# EAGLE board PowerBoard (EAGLE 7.4.0)
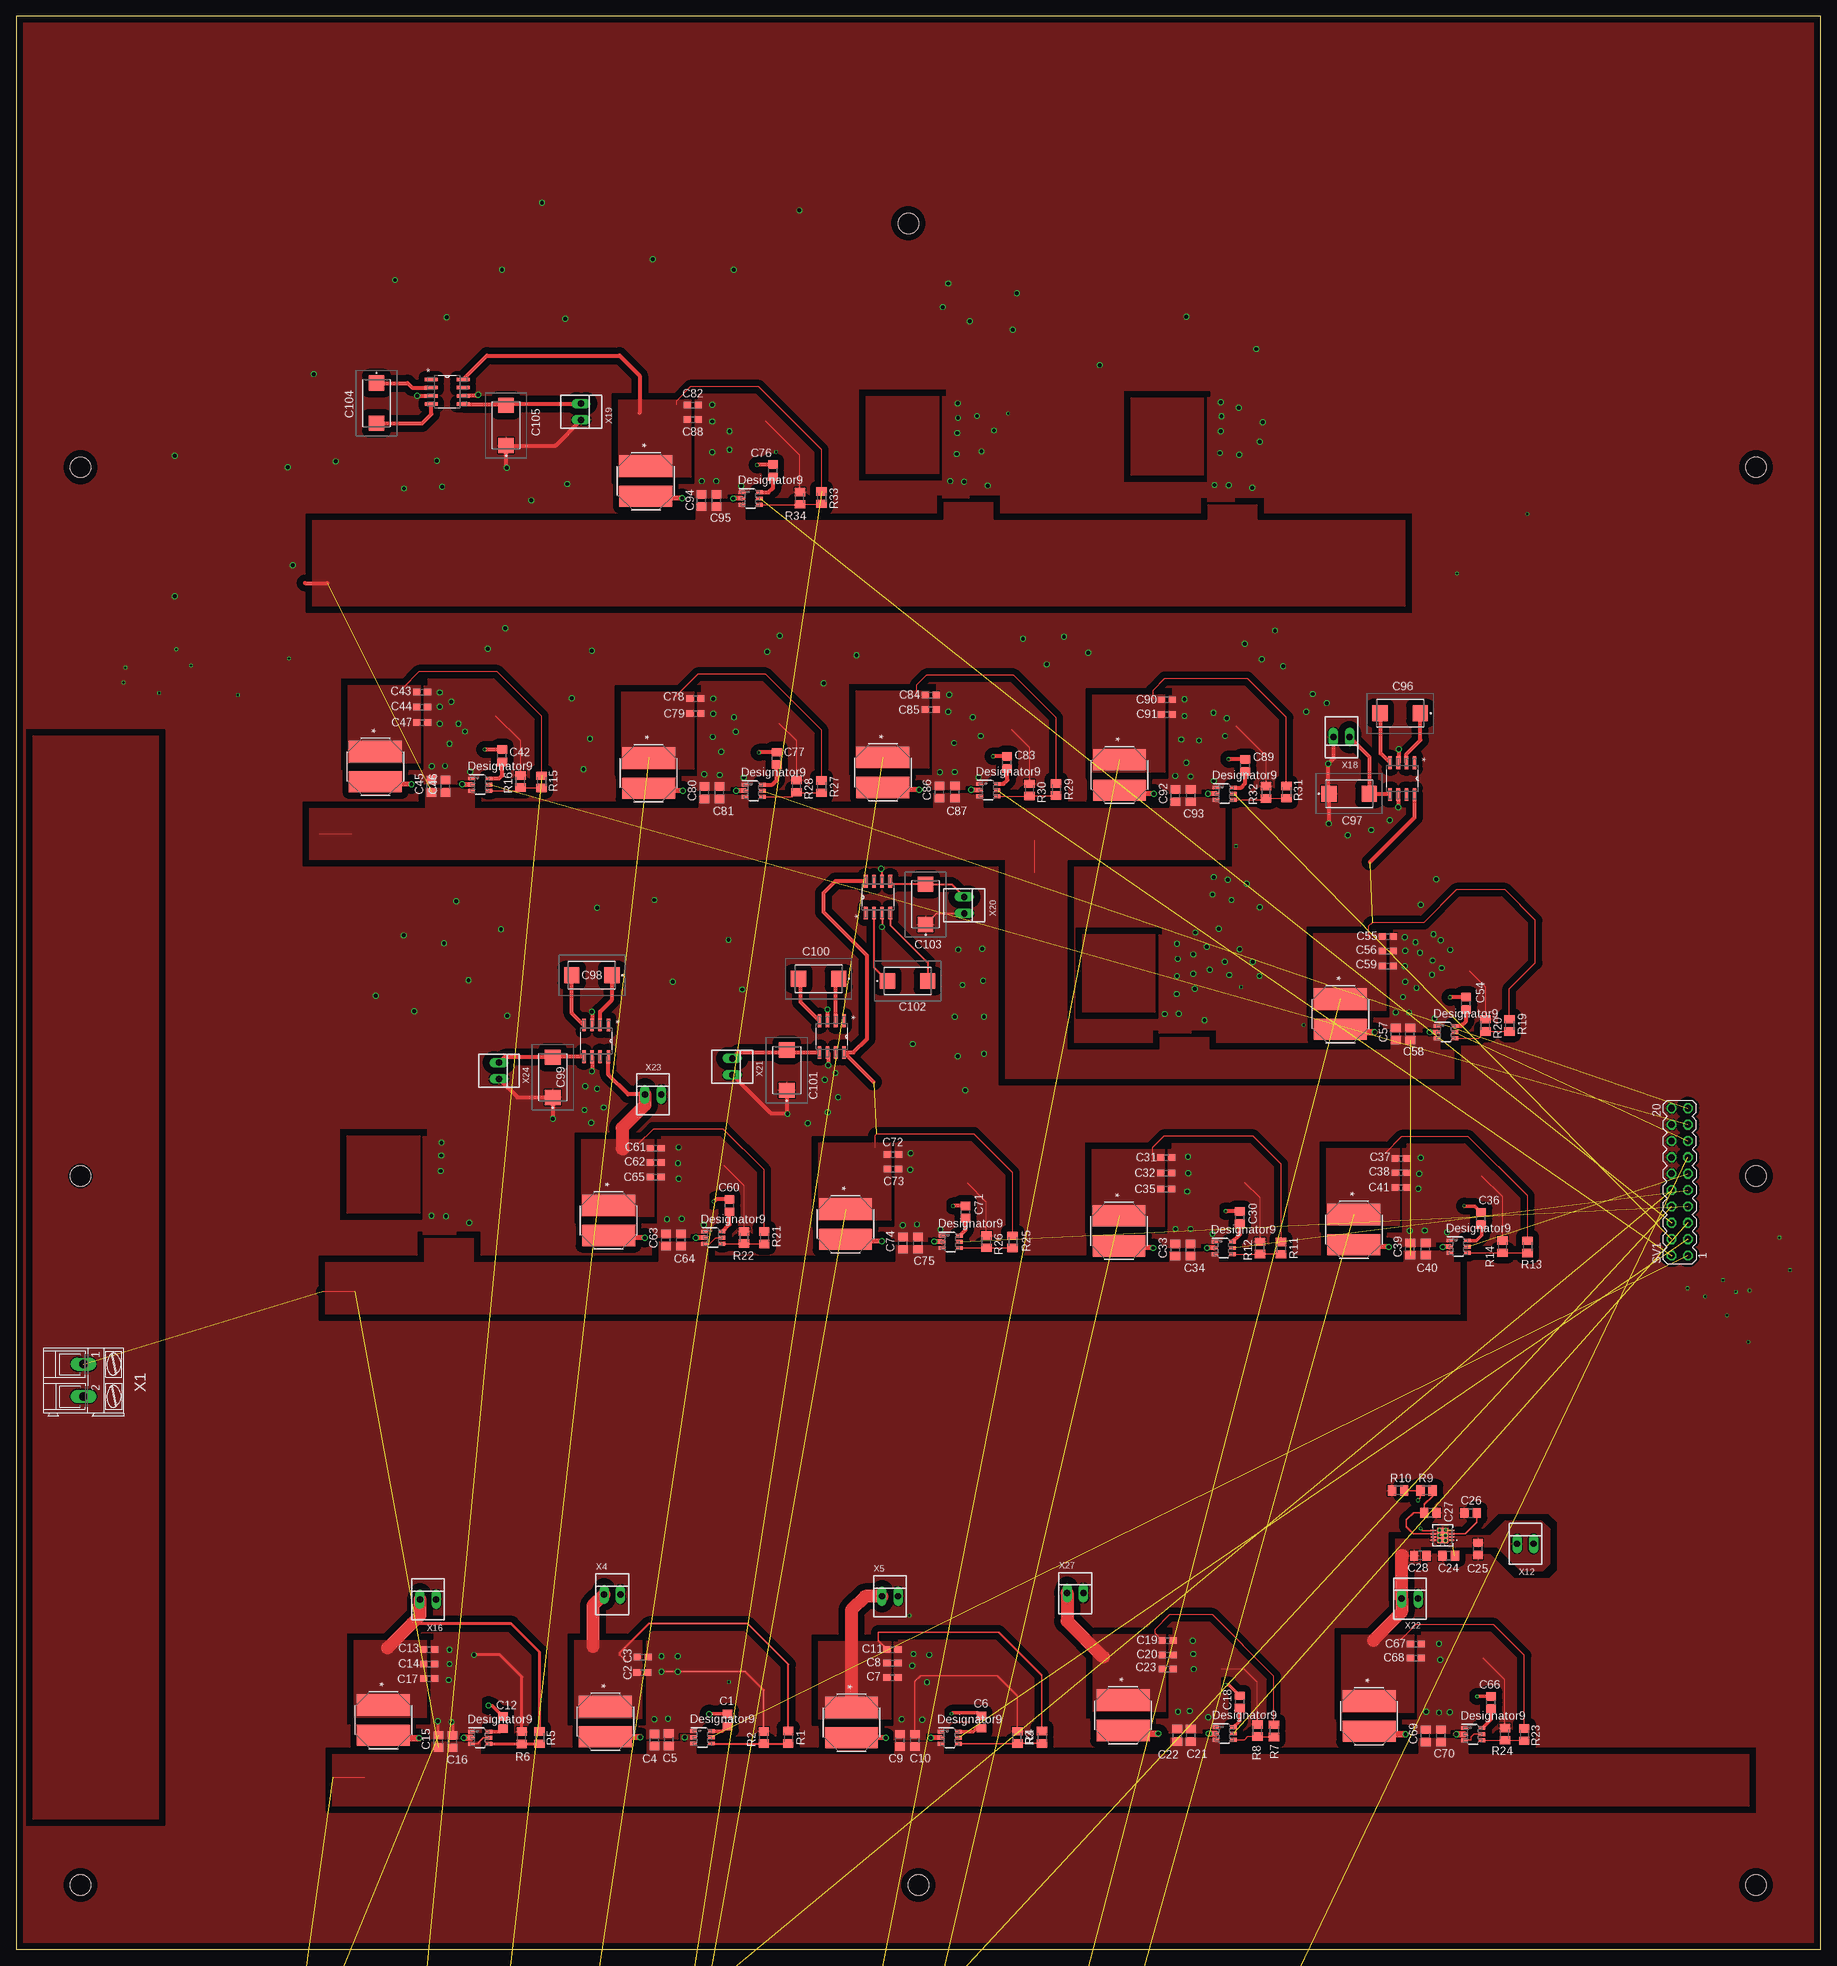
[diagram p0: board, top side]
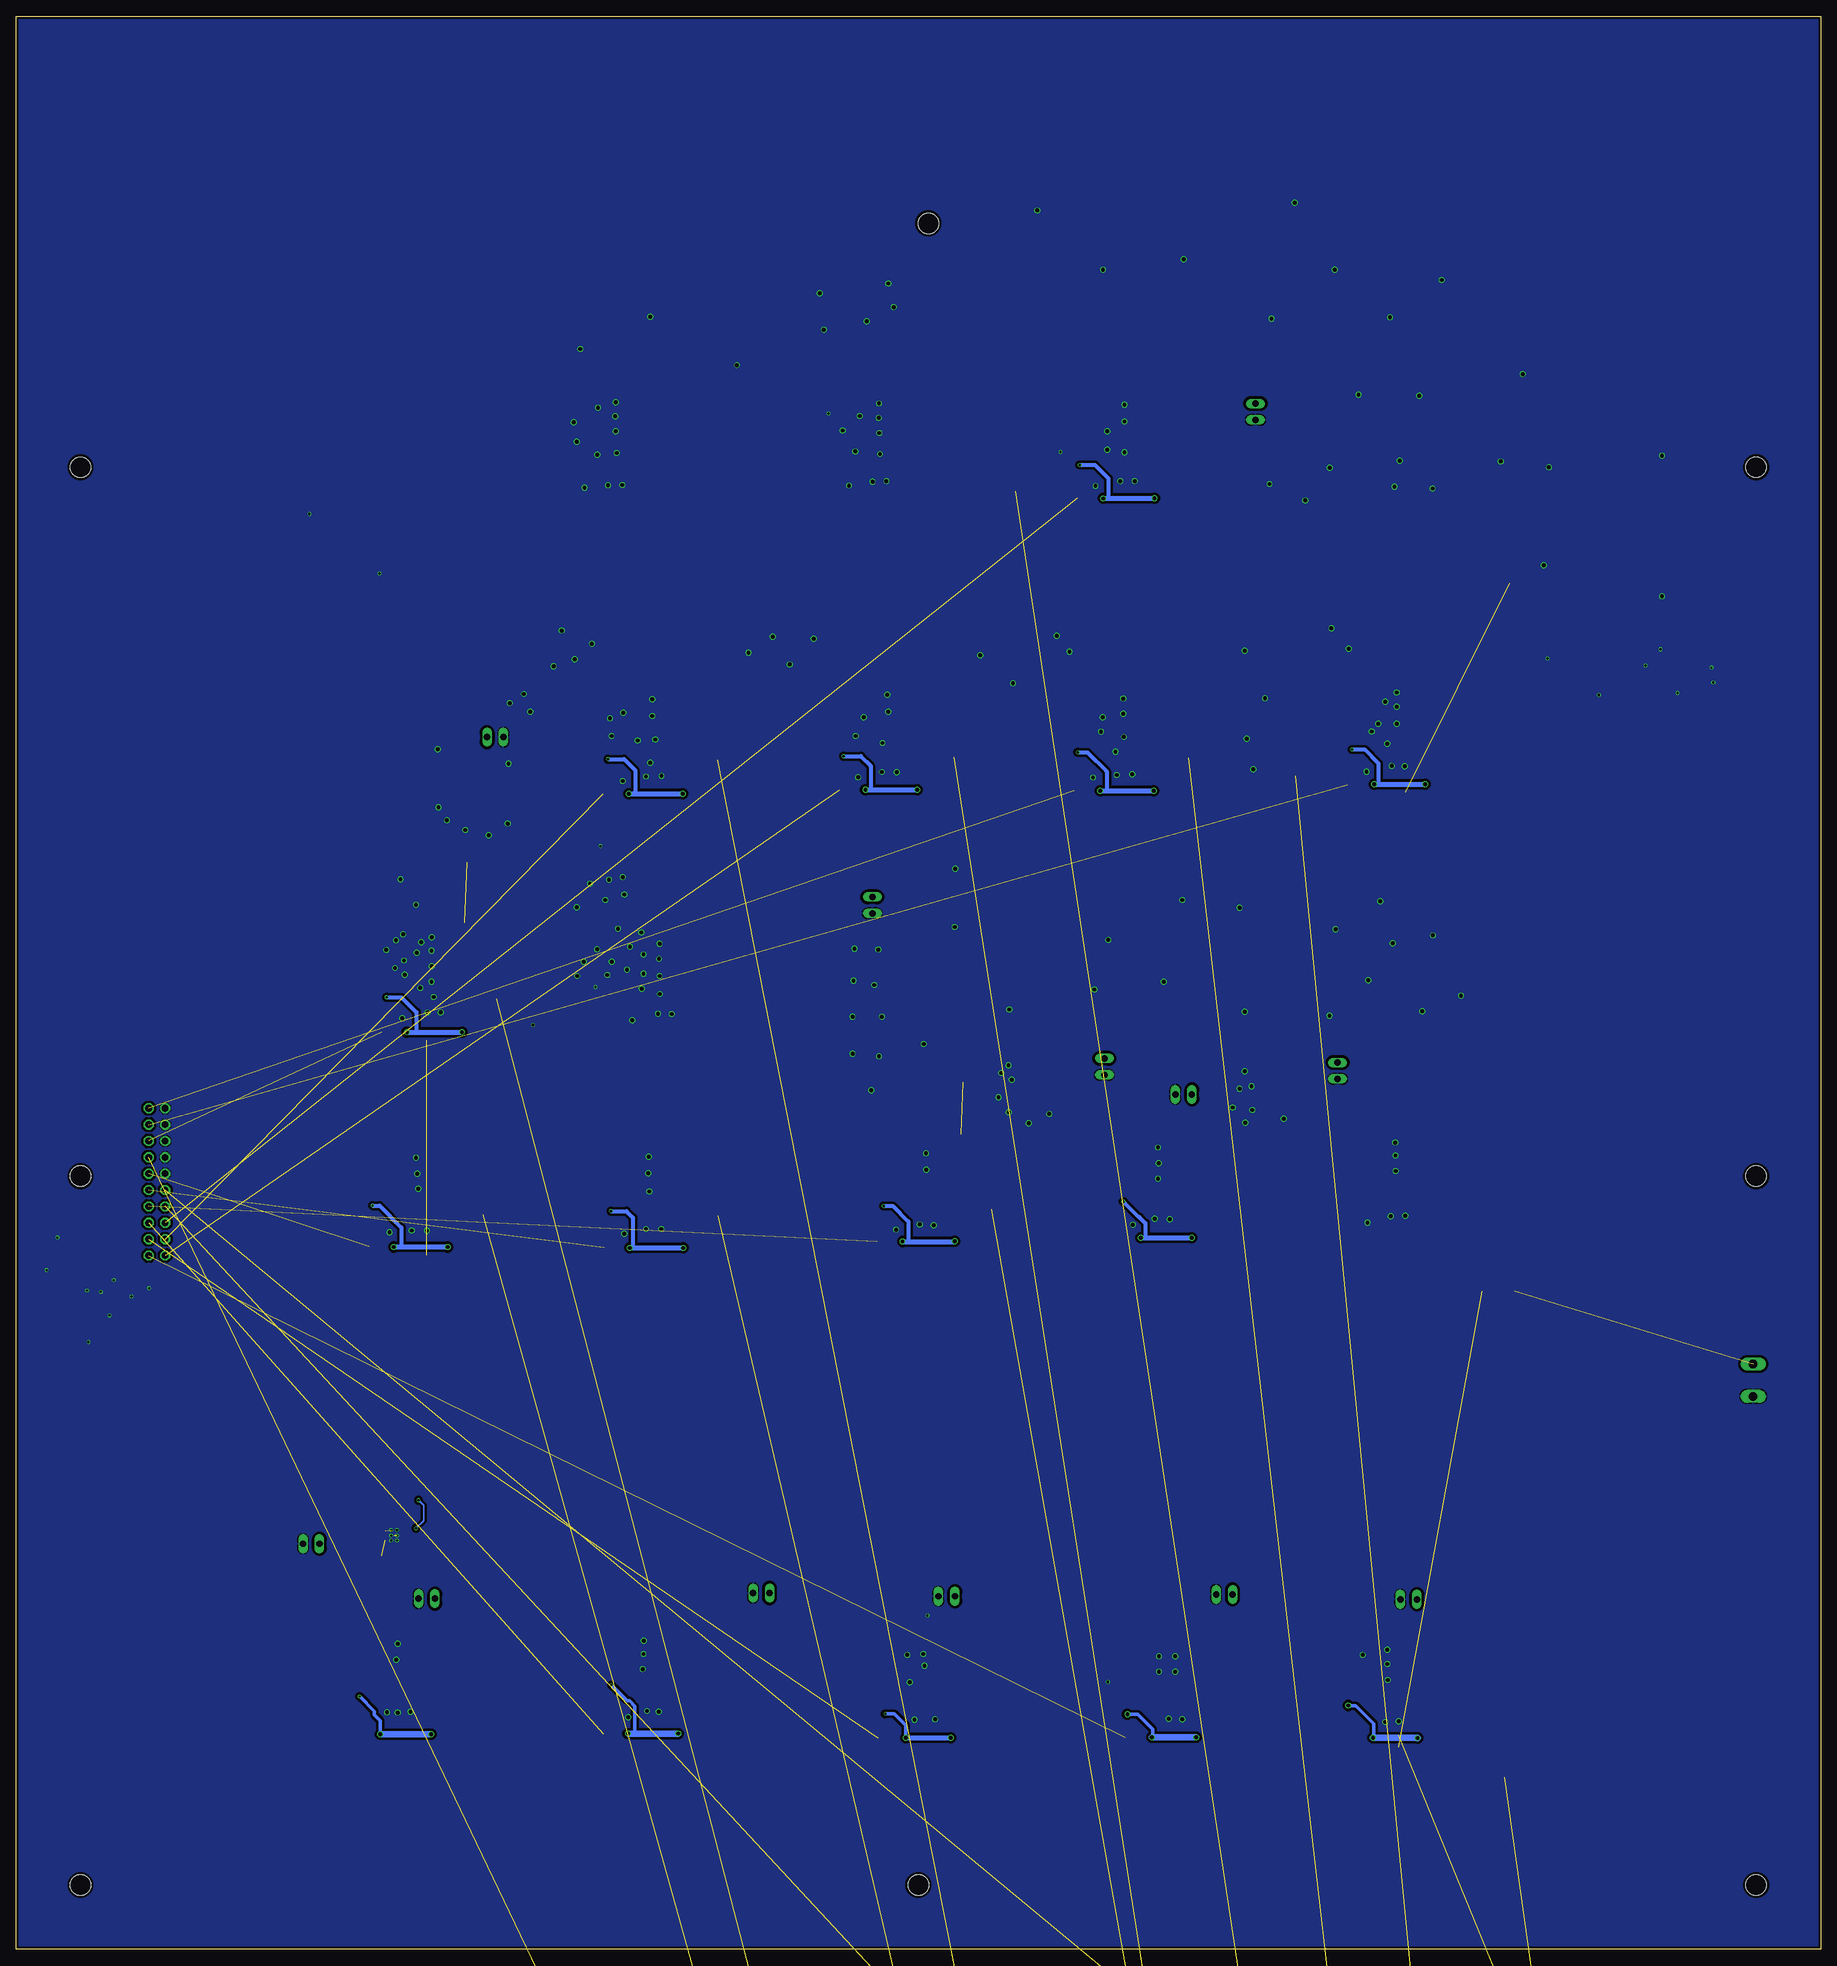
[diagram p1: board, bottom side, seen from below]

Size 280 x 300 mm. Coordinates in mm from the lower left corner, seen from the top.
Outline: 0,0 280,0 280,300 0,300 0,0
Copper layers (1*16): Top 0.035mm / dielectric 1.5mm / Bottom 0.035mm
Design rules "PCBWay_2L_100um-Track *": minimum track width 0.1mm, minimum drill 0.3mm, track to track 0.2mm, track to pad 0.1mm, pad to pad 0.1mm, via to via 0.1mm, smd to smd 0mil, copper to edge 0.3mm, drill to drill 10mil, minimum pad ring 6mil, minimum via ring 0.1mm, stop-mask expansion 2mil, vias tented up to drill 0.45mm, thermal gap 0.2mm
Holes 3.2 mm at 10,10 270,10 270,230 10,230 138.45,267.85 140,10 270,120 10,120

## Footprints (pad centres in the part's own frame; a part is rotated, then mirrored left to right if it is on the bottom)
C0805 = smd 1.3 x 1.5: 1 -0.95,0; 2 0.95,0
C0603 = smd 1.1 x 1: 1 -0.85,0; 2 0.85,0
T521W = smd 2.37 x 2.43: 1 -3.12,0; 2 3.12,0
M0805 = smd 1.3 x 1.6: 1 -0.95,0; 2 0.95,0
MA10-2 = drill 1.016 octagon: 1 -11.43,-1.27; 2 -11.43,1.27; 3 -8.89,-1.27; 4 -8.89,1.27; 5 -6.35,-1.27; 6 -6.35,1.27; 7 -3.81,-1.27; 8 -3.81,1.27; 9 -1.27,-1.27; 10 -1.27,1.27; 11 1.27,-1.27; 12 1.27,1.27; 13 3.81,-1.27; 14 3.81,1.27; 15 6.35,-1.27; 16 6.35,1.27; 17 8.89,-1.27; 18 8.89,1.27; 19 11.43,-1.27; 20 11.43,1.27
DDC0006A_N = smd 1 x 0.6: 1 -1.375,0.95; 2 -1.375,0; 3 -1.375,-0.95; 4 1.375,-0.95; 5 1.375,0; 6 1.375,0.95
CP_8_11_ADI = smd 0.805 x 0.249: 1 -1.402,0.75; 2 -1.402,0.25; 3 -1.402,-0.25; 4 -1.402,-0.75; 5 1.402,-0.75; 6 1.402,-0.25; 7 1.402,0.25; 8 1.402,0.75 | smd 1.7 x 2.44: 9 0,0
M08A = smd 1.981 x 0.559: 1 -2.464,1.905; 2 -2.464,0.635; 3 -2.464,-0.635; 4 -2.464,-1.905; 5 2.464,-1.905; 6 2.464,-0.635; 7 2.464,0.635; 8 2.464,1.905
RGR20_2P05X2P05_TEX = smd 0.85 x 0.28: 1 -1.725,1; 2 -1.725,0.5; 3 -1.725,0; 4 -1.725,-0.5; 5 -1.725,-1; 11 1.725,-1; 12 1.725,-0.5; 13 1.725,0; 14 1.725,0.5; 15 1.725,1 | smd 0.28 x 0.85: 6 -1,-1.725; 7 -0.5,-1.725; 8 0,-1.725; 9 0.5,-1.725; 10 1,-1.725; 16 1,1.725; 17 0.5,1.725; 18 0,1.725; 19 -0.5,1.725; 20 -1,1.725 | smd 2.05 x 2.05: 21 0,0 | drill 0.254 pad 0.508: V -0.406,-0.406; V_1 -0.406,0.406; V_2 0.406,-0.406; V_3 0.406,0.406
IND_VLP8040T-1R0N_TDK = smd 3.302 x 8.204: 1 -2.35,0; 2 2.35,0
AK300/2 = drill 1.321 long: 1 -2.515,0; 2 2.489,0
22-23-2021 = drill 1 long: 1 -1.27,0; 2 1.27,0

## Placement (x,y rotation side)
C1  0.1µF  [C0805]  110.38,35.59 90 top
C2  22µF  [C0603]  97.19,42.97 0 top
C3  22µF  [C0603]  97.24,45.37 0 top
C4  10µF  [C0805]  99.08,32.49 90 top
C5  10µF  [C0805]  101.28,32.54 90 top
C6  0.1µF  [C0805]  149.78,35.27 90 top
C7  22µF  [C0603]  135.99,42.17 0 top
C8  22µF  [C0603]  135.99,44.42 0 top
C9  10µF  [C0805]  137.18,32.44 90 top
C10  10µF  [C0805]  139.48,32.44 90 top
C11  22µF  [C0603]  135.99,46.57 0 top
C12  0.1µF  [C0805]  75.53,35.22 90 top
C13  22µF  [C0603]  64.09,46.52 0 top
C14  22µF  [C0603]  64.09,44.27 0 top
C15  10µF  [C0805]  65.53,32.29 90 top
C16  10µF  [C0805]  67.73,32.24 90 top
C17  22µF  [C0603]  64.09,42.02 0 top
C18  0.1µF  [C0805]  189.88,38.42 90 top
C19  22µF  [C0603]  178.69,47.92 0 top
C20  22µF  [C0603]  178.69,45.72 0 top
C21  10µF  [C0805]  182.28,33.24 90 top
C22  10µF  [C0805]  180.18,33.24 90 top
C23  22µF  [C0603]  178.69,43.52 0 top
C24  10µF  [C0805]  222.3,61.1 0 top
C25  10µF  [C0805]  226.85,62.15 90 top
C26  1µF  [C0805]  225.7,67.7 0 top
C27  1µF  [C0805]  219.45,67.75 180 top
C28  10µF  [C0805]  217.9,61.1 180 top
C29  0.1µF  [C0805]  41.8,-98.35 0 top  (outside the outline)
C30  0.1µF  [C0805]  189.88,113.57 90 top
C31  22µF  [C0603]  178.49,122.87 0 top
C32  22µF  [C0603]  178.49,120.47 0 top
C33  10µF  [C0805]  179.88,108.54 90 top
C34  10µF  [C0805]  182.23,108.54 90 top
C35  22µF  [C0603]  178.49,118.02 0 top
C36  0.1µF  [C0805]  227.33,113.42 90 top
C37  22µF  [C0603]  214.89,122.72 0 top
C38  22µF  [C0603]  214.89,120.52 0 top
C39  10µF  [C0805]  216.33,108.69 90 top
C40  10µF  [C0805]  218.73,108.69 90 top
C41  22µF  [C0603]  214.89,118.22 0 top
C42  0.1µF  [C0805]  75.43,185.22 90 top
C43  22µF  [C0603]  62.99,195.12 0 top
C44  22µF  [C0603]  62.99,192.77 0 top
C45  10µF  [C0805]  64.48,180.49 90 top
C46  10µF  [C0805]  66.63,180.49 90 top
C47  22µF  [C0603]  63.02,190.37 0 top
C48  22µF  [C0603]  27.55,-126.45 0 top  (outside the outline)
C49  22µF  [C0603]  33.05,-126.45 0 top  (outside the outline)
C50  10µF  [C0805]  24,-120.9 0 top  (outside the outline)
C51  10µF  [C0805]  29.35,-120.9 0 top  (outside the outline)
C52  10µF  [C0805]  34.7,-120.9 0 top  (outside the outline)
C53  10µF  [C0805]  40.05,-120.9 0 top  (outside the outline)
C54  0.1µF  [C0805]  224.98,146.82 90 top
C55  22µF  [C0603]  212.87,157.17 0 top
C56  22µF  [C0603]  212.87,154.92 0 top
C57  10µF  [C0805]  214.08,142.04 90 top
C58  10µF  [C0805]  216.33,142.04 90 top
C59  22µF  [C0603]  212.87,152.62 0 top
C60  0.1µF  [C0805]  110.68,115.42 90 top
C61  22µF  [C0603]  99.22,124.32 0 top
C62  22µF  [C0603]  99.22,122.12 0 top
C63  10µF  [C0805]  100.83,110.09 90 top
C64  10µF  [C0805]  103.18,110.09 90 top
C65  22µF  [C0603]  99.22,119.87 0 top
C66  0.1µF  [C0805]  228.88,38.32 90 top
C67  22µF  [C0603]  217.22,47.42 0 top
C68  22µF  [C0603]  217.22,45.22 0 top
C69  10µF  [C0805]  218.73,33.14 90 top
C70  10µF  [C0805]  221.13,33.14 90 top
C71  0.1µF  [C0805]  147.33,114.42 90 top
C72  22µF  [C0603]  136.07,123.32 0 top
C73  22µF  [C0603]  136.07,121.07 0 top
C74  10µF  [C0805]  137.63,109.59 90 top
C75  10µF  [C0805]  139.93,109.59 90 top
C76  0.1µF  [C0805]  117.43,229.47 90 top
C77  0.1µF  [C0805]  118.03,184.82 90 top
C78  22µF  [C0603]  105.42,194.12 0 top
C79  22µF  [C0603]  105.42,191.77 0 top
C80  10µF  [C0805]  106.83,179.49 90 top
C81  10µF  [C0805]  109.13,179.49 90 top
C82  22µF  [C0603]  105.02,239.67 0 top
C83  0.1µF  [C0805]  153.78,184.17 90 top
C84  22µF  [C0603]  141.92,194.67 0 top
C85  22µF  [C0603]  141.92,192.37 0 top
C86  10µF  [C0805]  143.28,179.59 90 top
C87  10µF  [C0805]  145.68,179.59 90 top
C88  22µF  [C0603]  105.02,237.42 0 top
C89  0.1µF  [C0805]  190.73,183.72 90 top
C90  22µF  [C0603]  178.57,193.92 0 top
C91  22µF  [C0603]  178.57,191.62 0 top
C92  10µF  [C0805]  179.93,179.04 90 top
C93  10µF  [C0805]  182.28,179.04 90 top
C94  10µF  [C0805]  106.38,224.84 90 top
C95  10µF  [C0805]  108.68,224.84 90 top
C96  T521W476M020ATE045  [T521W]  214.77,191.81 180 top
C97  T521W476M020ATE045  [T521W]  206.84,179.34 0 top
C98  T521W476M020ATE045  [T521W]  89.35,151.16 180 top
C99  T521W476M020ATE045  [T521W]  83.28,135.32 90 top
C100  T521W476M020ATE045  [T521W]  124.52,150.63 180 top
C101  T521W476M020ATE045  [T521W]  119.58,136.44 90 top
C102  T521W476M020ATE045  [T521W]  138.35,150.27 0 top
C103  T521W476M020ATE045  [T521W]  141.13,162.16 90 top
C104  T521W476M020ATE045  [T521W]  55.92,239.93 270 top
C105  T521W476M020ATE045  [T521W]  76.03,236.48 90 top
C106  1µF  [C0805]  7.5,-120.9 0 top  (outside the outline)
C107  1µF  [C0805]  13,-120.9 0 top  (outside the outline)
C108  10µF  [C0805]  18.5,-120.9 0 top  (outside the outline)
C109  0.1µF  [C0805]  18.6,-207.85 0 top  (outside the outline)
C110  22µF  [C0603]  56,-224.25 0 top  (outside the outline)
C111  22µF  [C0603]  61.5,-224.25 0 top  (outside the outline)
C112  10µF  [C0805]  12.9,-218.7 0 top  (outside the outline)
C113  10µF  [C0805]  18.3,-218.7 0 top  (outside the outline)
C114  10µF  [C0805]  23.7,-218.7 0 top  (outside the outline)
C115  10µF  [C0805]  29.1,-218.7 0 top  (outside the outline)
C116  1µF  [C0805]  34.5,-218.7 0 top  (outside the outline)
C117  1µF  [C0805]  39.9,-218.7 0 top  (outside the outline)
C118  10µF  [C0805]  45.3,-218.7 0 top  (outside the outline)
C119  0.1µF  [C0805]  24.45,-207.85 0 top  (outside the outline)
C120  22µF  [C0603]  44.7,-224.25 0 top  (outside the outline)
C121  22µF  [C0603]  50.35,-224.25 0 top  (outside the outline)
C122  10µF  [C0805]  41.5,-207.85 0 top  (outside the outline)
C123  10µF  [C0805]  47,-207.85 0 top  (outside the outline)
C124  10µF  [C0805]  52.5,-207.85 0 top  (outside the outline)
C125  10µF  [C0805]  58,-207.85 0 top  (outside the outline)
C126  1µF  [C0805]  63.5,-207.85 0 top  (outside the outline)
C127  1µF  [C0805]  1.9,-218.7 0 top  (outside the outline)
C128  10µF  [C0805]  7.4,-218.7 0 top  (outside the outline)
C129  0.1µF  [C0805]  41.8,-257.05 0 top  (outside the outline)
C130  22µF  [C0603]  32.05,-285.15 0 top  (outside the outline)
C131  22µF  [C0603]  37.7,-285.15 0 top  (outside the outline)
C132  10µF  [C0805]  7.5,-279.6 0 top  (outside the outline)
C133  10µF  [C0805]  13,-279.6 0 top  (outside the outline)
C134  10µF  [C0805]  18.5,-279.6 0 top  (outside the outline)
C135  10µF  [C0805]  24,-279.6 0 top  (outside the outline)
C136  1µF  [C0805]  29.5,-279.6 0 top  (outside the outline)
C137  1µF  [C0805]  35,-279.6 0 top  (outside the outline)
C138  10µF  [C0805]  40.5,-279.6 0 top  (outside the outline)
C139  10µF  [C0805]  1.9,-317.95 0 top  (outside the outline)
C140  10µF  [C0805]  7.4,-317.95 0 top  (outside the outline)
C141  1µF  [C0805]  12.9,-317.95 0 top  (outside the outline)
C142  1µF  [C0805]  18.4,-317.95 0 top  (outside the outline)
C143  10µF  [C0805]  23.9,-317.95 0 top  (outside the outline)
C144  0.1µF  [C0805]  10.25,-352.8 0 top  (outside the outline)
C145  22µF  [C0603]  23.15,-363.05 0 top  (outside the outline)
C146  22µF  [C0603]  28.9,-363.05 0 top  (outside the outline)
C147  10µF  [C0805]  21.7,-352.8 0 top  (outside the outline)
C148  10µF  [C0805]  27.2,-352.8 0 top  (outside the outline)
C149  22µF  [C0603]  1.4,-392.05 0 top  (outside the outline)
C150  10nF  [C0603]  1.4,-396.95 0 top  (outside the outline)
C151  10µF  [C0603]  1.4,-414.2 0 top  (outside the outline)
C152  10nF  [C0603]  1.4,-419.1 0 top  (outside the outline)
C153  10µF  [C0603]  1.4,-424 0 top  (outside the outline)
C154  0.1µF  [C0805]  41.8,-452.4 0 top  (outside the outline)
C155  22µF  [C0603]  19.05,-480.45 0 top  (outside the outline)
C156  22µF  [C0603]  25.2,-480.45 0 top  (outside the outline)
C157  10µF  [C0805]  13.1,-474.9 0 top  (outside the outline)
C158  10µF  [C0805]  18.6,-474.9 0 top  (outside the outline)
C159  22µF  [C0603]  31.35,-480.45 0 top  (outside the outline)
C160  10nF  [C0603]  37,-480.45 0 top  (outside the outline)
C161  10µF  [C0603]  1.4,-486.15 0 top  (outside the outline)
C162  10nF  [C0603]  7.05,-486.15 0 top  (outside the outline)
C163  10µF  [C0603]  12.7,-486.15 0 top  (outside the outline)
R1  3.09k  [M0805]  119.83,32.92 90 top
R2  10k  [M0805]  116.02,32.88 270 top
R3  13.7k  [M0805]  159.18,32.92 90 top
R4  10k  [M0805]  155.37,32.91 270 top
R5  32.2k  [M0805]  81.23,32.87 90 top
R6  10k  [M0805]  78.47,32.84 270 top
R7  32.2k  [M0805]  195.18,33.92 90 top
R8  10k  [M0805]  192.62,33.97 270 top
R9  12k  [M0805]  218.85,71.2 0 top
R10  10k  [M0805]  214.45,71.2 0 top
R11  32.2k  [M0805]  196.28,108.82 90 top
R12  10k  [M0805]  193.02,108.87 270 top
R13  32.2k  [M0805]  234.53,109.02 90 top
R14  10k  [M0805]  230.67,109.05 270 top
R15  32.2k  [M0805]  81.53,181.17 90 top
R16  10k  [M0805]  78.27,181.23 270 top
R17  56.2k  [M0805]  1.9,-120.9 0 top  (outside the outline)
R18  10k  [M0805]  45.4,-120.9 0 top  (outside the outline)
R19  32.2k  [M0805]  231.73,143.39 90 top
R20  10k  [M0805]  228.02,143.39 270 top
R21  34.8k  [M0805]  116.08,110.44 90 top
R22  10k  [M0805]  112.97,110.47 270 top
R23  56.2k  [M0805]  234.03,33.34 90 top
R24  10k  [M0805]  231.02,33.4 270 top
R25  56.2k  [M0805]  154.63,109.79 90 top
R26  10k  [M0805]  150.57,109.83 270 top
R27  56.2k  [M0805]  124.98,180.44 90 top
R28  10k  [M0805]  121.12,180.51 270 top
R29  56.2k  [M0805]  161.38,179.99 90 top
R30  10k  [M0805]  157.27,179.94 270 top
R31  56.2k  [M0805]  197.13,179.59 90 top
R32  10k  [M0805]  193.97,179.57 270 top
R33  61.9k  [M0805]  124.98,225.29 90 top
R34  10k  [M0805]  121.62,225.2 270 top
R35  12k  [M0805]  1.9,-127.05 0 top  (outside the outline)
R36  10k  [M0805]  6.4,-127.05 0 top  (outside the outline)
R37  56.2k  [M0805]  30.3,-207.85 0 top  (outside the outline)
R38  10k  [M0805]  50.7,-218.7 0 top  (outside the outline)
R39  2k  [M0805]  55.2,-218.7 0 top  (outside the outline)
R40  10k  [M0805]  59.7,-218.7 0 top  (outside the outline)
R41  56.2k  [M0805]  35.9,-207.85 0 top  (outside the outline)
R42  10k  [M0805]  64.2,-218.7 0 top  (outside the outline)
R43  12k  [M0805]  1.9,-224.85 0 top  (outside the outline)
R44  10k  [M0805]  6.4,-224.85 0 top  (outside the outline)
R45  56.2k  [M0805]  1.9,-279.6 0 top  (outside the outline)
R46  10k  [M0805]  1.9,-285.75 0 top  (outside the outline)
R47  12k  [M0805]  6.4,-285.75 0 top  (outside the outline)
R48  10k  [M0805]  10.9,-285.75 0 top  (outside the outline)
R49  23.4k  [M0805]  29.4,-317.95 0 top  (outside the outline)
R50  10k  [M0805]  1.9,-324.1 0 top  (outside the outline)
R51  56.2k  [M0805]  16.1,-352.8 0 top  (outside the outline)
R52  10k  [M0805]  1.9,-363.65 0 top  (outside the outline)
R53  35.7k  [M0805]  1.9,-402.5 0 top  (outside the outline)
R54  11.5k  [M0805]  1.9,-408.65 0 top  (outside the outline)
R55  56.2k  [M0805]  1.9,-474.9 0 top  (outside the outline)
R56  10k  [M0805]  29.6,-474.9 0 top  (outside the outline)
R57  35.7k  [M0805]  7.5,-474.9 0 top  (outside the outline)
R58  11.5k  [M0805]  24.1,-474.9 0 top  (outside the outline)
SV1  [MA10-2]  258.15,119.1 90 top
U1  TPS562208DDCT  [DDC0006A_N]  106.52,32.9 0 top
U2  TPS562208DDCT  [DDC0006A_N]  144.89,32.85 0 top
U3  TPS562208DDCT  [DDC0006A_N]  72.01,32.85 0 top
U4  TPS562208DDCT  [DDC0006A_N]  187.53,33.5 0 top
U5  ADM7151ACPZ-04-R7  [CP_8_11_ADI]  221.35,64.25 180 top
U6  TPS562208DDCT  [DDC0006A_N]  187.37,108.85 0 top
U7  TPS562208DDCT  [DDC0006A_N]  223.84,109.05 0 top
U8  TPS562208DDCT  [DDC0006A_N]  72.03,180.75 0 top
U9  TPS562208DDCT  [DDC0006A_N]  12.7,-128 0 top  (outside the outline)
U10  TPS562208DDCT  [DDC0006A_N]  221.87,142.35 0 top
U11  TPS562208DDCT  [DDC0006A_N]  108.19,110.45 0 top
U12  TPS562208DDCT  [DDC0006A_N]  226.11,33.4 0 top
U13  TPS562208DDCT  [DDC0006A_N]  145.03,109.8 0 top
U14  TPS562208DDCT  [DDC0006A_N]  114.45,179.8 0 top
U15  TPS562208DDCT  [DDC0006A_N]  150.87,179.9 0 top
U16  TPS562208DDCT  [DDC0006A_N]  187.54,179.35 0 top
U17  TPS562208DDCT  [DDC0006A_N]  113.98,225.15 0 top
U18  LM2662MX/NOPB  [M08A]  215.1,181.69 270 top
U19  LM2662MX/NOPB  [M08A]  90,140.97 270 top
U20  LM2662MX/NOPB  [M08A]  126.55,141.65 270 top
U21  LM2662MX/NOPB  [M08A]  133.74,163.28 90 top
U22  LM2662MX/NOPB  [M08A]  66.9,241.71 0 top
U23  ADM7151ACPZ-04-R7  [CP_8_11_ADI]  20.05,-77.75 0 top  (outside the outline)
U24  TPS562208DDCT  [DDC0006A_N]  12.7,-225.8 0 top  (outside the outline)
U25  ADM7151ACPZ-04-R7  [CP_8_11_ADI]  20.05,-138.65 0 top  (outside the outline)
U26  TPS562208DDCT  [DDC0006A_N]  29.85,-225.8 0 top  (outside the outline)
U27  ADM7151ACPZ-04-R7  [CP_8_11_ADI]  20.05,-164.7 0 top  (outside the outline)
U28  TPS562208DDCT  [DDC0006A_N]  17.2,-286.7 0 top  (outside the outline)
U29  ADM7151ACPZ-04-R7  [CP_8_11_ADI]  20.05,-236.45 0 top  (outside the outline)
U30  ADM7151ACPZ-04-R7  [CP_8_11_ADI]  20.05,-297.35 0 top  (outside the outline)
U31  TPS562208DDCT  [DDC0006A_N]  8.2,-364.6 0 top  (outside the outline)
U32  TPS7A8300RGRR  [RGR20_2P05X2P05_TEX]  20.05,-374.6 0 top  (outside the outline)
U33  TPS562208DDCT  [DDC0006A_N]  3.7,-482 0 top  (outside the outline)
U34  TPS7A8300RGRR  [RGR20_2P05X2P05_TEX]  20.05,-434.3 0 top  (outside the outline)
U$1  2.2µH  [IND_VLP8040T-1R0N_TDK]  91.43,35.34 270 top
U$2  2.2µH  [IND_VLP8040T-1R0N_TDK]  129.63,35.19 270 top
U$3  3.3µH  [IND_VLP8040T-1R0N_TDK]  56.98,35.59 270 top
U$4  3.3µH  [IND_VLP8040T-1R0N_TDK]  171.78,36.34 270 top
U$5  3.3µH  [IND_VLP8040T-1R0N_TDK]  16.8,-100.2 0 top  (outside the outline)
U$6  3.3µH  [IND_VLP8040T-1R0N_TDK]  171.14,111.49 270 top
U$7  3.3µH  [IND_VLP8040T-1R0N_TDK]  207.59,111.69 270 top
U$8  3.3µH  [IND_VLP8040T-1R0N_TDK]  55.74,183.54 270 top
U$9  3.3µH  [IND_VLP8040T-1R0N_TDK]  16.8,-187.15 0 top  (outside the outline)
U$10  3.3µH  [IND_VLP8040T-1R0N_TDK]  205.49,145.14 270 top
U$11  3.3µH  [IND_VLP8040T-1R0N_TDK]  91.95,113.14 270 top
U$12  3.3µH  [IND_VLP8040T-1R0N_TDK]  209.95,36.19 270 top
U$13  3.3µH  [IND_VLP8040T-1R0N_TDK]  128.7,112.54 270 top
U$14  3.3µH  [IND_VLP8040T-1R0N_TDK]  98.15,182.54 270 top
U$15  3.3µH  [IND_VLP8040T-1R0N_TDK]  134.5,182.64 270 top
U$16  3.3µH  [IND_VLP8040T-1R0N_TDK]  171.21,182.24 270 top
U$17  3.3µH  [IND_VLP8040T-1R0N_TDK]  97.71,227.84 270 top
U$18  3.3µH  [IND_VLP8040T-1R0N_TDK]  48.3,-187.15 0 top  (outside the outline)
U$19  3.3µH  [IND_VLP8040T-1R0N_TDK]  16.8,-258.9 0 top  (outside the outline)
U$20  3.3µH  [IND_VLP8040T-1R0N_TDK]  16.8,-332.1 0 top  (outside the outline)
U$21  3.3µH  [IND_VLP8040T-1R0N_TDK]  16.8,-454.2 0 top  (outside the outline)
X1  [AK300/2]  10.45,88.3 270 top
X2  22-23-2021  [22-23-2021]  34.5,-100.55 0 top  (outside the outline)
X3  22-23-2021  [22-23-2021]  2.95,-591.95 0 top  (outside the outline)
X4  22-23-2021  [22-23-2021]  92.5,55.1 0 top
X5  22-23-2021  [22-23-2021]  135.6,54.8 0 top
X6  22-23-2021  [22-23-2021]  2.95,-526.55 0 top  (outside the outline)
X7  22-23-2021  [22-23-2021]  2.95,-537.45 0 top  (outside the outline)
X8  22-23-2021  [22-23-2021]  2.95,-548.35 0 top  (outside the outline)
X9  22-23-2021  [22-23-2021]  2.95,-210 0 top  (outside the outline)
X10  22-23-2021  [22-23-2021]  2.95,-559.25 0 top  (outside the outline)
X11  22-23-2021  [22-23-2021]  2.95,-570.15 0 top  (outside the outline)
X12  22-23-2021  [22-23-2021]  234.2,62.95 0 top
X13  22-23-2021  [22-23-2021]  2.95,-602.85 0 top  (outside the outline)
X14  22-23-2021  [22-23-2021]  2.95,-613.75 0 top  (outside the outline)
X15  22-23-2021  [22-23-2021]  2.95,-624.65 0 top  (outside the outline)
X16  22-23-2021  [22-23-2021]  63.92,54.33 0 top
X17  22-23-2021  [22-23-2021]  11.3,-210 0 top  (outside the outline)
X18  22-23-2021  [22-23-2021]  205.66,188.12 180 top
X19  22-23-2021  [22-23-2021]  87.68,238.6 270 top
X20  22-23-2021  [22-23-2021]  147.13,162.04 270 top
X21  22-23-2021  [22-23-2021]  111.13,136.98 270 top
X22  22-23-2021  [22-23-2021]  216.28,54.43 0 top
X23  22-23-2021  [22-23-2021]  98.84,132.68 0 top
X24  22-23-2021  [22-23-2021]  74.93,136.35 270 top
X25  22-23-2021  [22-23-2021]  34.5,-259.25 0 top  (outside the outline)
X26  22-23-2021  [22-23-2021]  2.95,-354.95 0 top  (outside the outline)
X27  22-23-2021  [22-23-2021]  164.35,55.3 0 top
X28  22-23-2021  [22-23-2021]  34.5,-454.55 0 top  (outside the outline)
X29  22-23-2021  [22-23-2021]  2.95,-635.55 0 top  (outside the outline)
X30  22-23-2021  [22-23-2021]  2.95,-646.45 0 top  (outside the outline)
X31  22-23-2021  [22-23-2021]  2.95,-657.35 0 top  (outside the outline)
X32  22-23-2021  [22-23-2021]  2.95,-668.25 0 top  (outside the outline)
X33  22-23-2021  [22-23-2021]  2.95,-679.15 0 top  (outside the outline)
X34  22-23-2021  [22-23-2021]  2.95,-690.05 0 top  (outside the outline)
X35  22-23-2021  [22-23-2021]  2.95,-700.95 0 top  (outside the outline)

## Library data of the parts
C1-C95 C106-C163 = rcl; SPICEPREFIX: C
C96-C105 = T521W476M020ATE045; DESCRIPTION: T521, Tantalum, Polymer Tantalum, Commercial Grade, 47 uF, 20%, 20 VDC, 105C, -55C, 105C, SMD, Polymer, Molded, Low Profile/ESR, NonCombustible, 2,000 Hrs, 9 % , 45 mOhms, 94 uA, 222.95 mg, 7343, 1.4mm, Height Max = 1.5mm, 1000, 52 Weeks; HEIGHT: 1.5mm; MANUFACTURER_NAME: KEMET; MANUFACTURER_PART_NUMBER: T521W476M020ATE045; MOUSER_PART_NUMBER: 80-T521W476M20ATE045; MOUSER_PRICE-STOCK: https://www.mouser.co.uk/ProductDetail/KEMET/T521W476M020ATE045?qs=Ad%252Bh9aq9FyVtchBw1jwoFA%3D%3D
R1-R58 = rcl; SPICEPREFIX: R
SV1 = con-lstb; OC_FARNELL: unknown; OC_NEWARK: unknown
U1-U4 U6-U17 U24 U26 U28 U31 U33 = My_Library_RADAR; COPYRIGHT: Copyright (C) 2025 Ultra Librarian. All rights reserved.; DATASHEET: https://www.ti.com/lit/gpn/tps562208; DESCRIPTION: 4.5 V to 17 V input, 2 A output, synchronous step-down converter in FCCM mode 6-SOT-23-THIN -40 to 125; MANUFACTURER_NAME: Texas Instruments; MANUFACTURER_PART_NUMBER: TPS562208DDCT; REFDES: RefDes; TYPE: TYPE
U5 U23 U25 U27 U29 U30 = My_Library_RADAR; COPYRIGHT: Copyright (C) 2025 Ultra Librarian. All rights reserved.; DATASHEET: https://www.analog.com/media/en/technical-documentation/data-sheets/ADM7151.pdf; DESCRIPTION: 800 mA Ultralow Noise, High PSRR, RF Linear Regulator; MANUFACTURER_NAME: Analog Devices Inc; MANUFACTURER_PART_NUMBER: ADM7151ACPZ-04-R7
U18-U22 = My_Library; COPYRIGHT: Copyright (C) 2024 Ultra Librarian. All rights reserved.; MANUFACTURER_PART_NUMBER: LM2662MX/NOPB; MFR_NAME: Texas Instruments; TYPE: LM2662M
U32 U34 = My_Library_RADAR; COPYRIGHT: Copyright (C) 2025 Ultra Librarian. All rights reserved.; DATASHEET: https://www.ti.com/lit/gpn/tps7a8300; DESCRIPTION: 2-A, low-VIN, low-2-A, low-VIN, low-noise, ultra-low-dropout voltage regulator with power good wi 20-VQFN -40 to 125; MANUFACTURER_NAME: Texas Instruments; MANUFACTURER_PART_NUMBER: TPS7A8300RGRR
U$1-U$21 = My_Library_RADAR
X1 = con-ptr500; OC_FARNELL: unknown; OC_NEWARK: unknown
X2-X35 = con-molex; MF: MOLEX; MPN: 22-23-2021; OC_FARNELL: 1462926; OC_NEWARK: 25C3832

## Nets
+1V0_FPGA: C2.1 C3.1 R1.2 U$1.1 X4.1
+1V8_CLOCK: C115.2 U25.2 X10.1
+1V8_FPGA: C7.1 C8.1 C11.1 R3.2 U$2.1 X5.1
+3V3: C13.1 C14.1 C17.1 R5.2 U$3.1 X16.1
+3V3_ADAR_12: C31.1 C32.1 C35.1 R11.2 U$6.1 X14.1
+3V3_ADAR_34: C37.1 C38.1 C41.1 R13.2 U$7.1 X15.1
+3V3_ADTR: C149.1 R53.2 U32.1 U32.19 U32.20 X34.1
+3V3_AN: C25.2 U5.2 X12.1
+3V3_CLOCK: C53.2 U23.2 X11.1
+3V3_FPGA: C19.1 C20.1 C23.1 R7.2 U$4.1 X27.1
+3V3_LO_1: C125.2 U27.2 X8.1
+3V3_LO_2: C135.2 U29.2 X7.1
+3V3_SW: C55.1 C56.1 C59.1 R19.2 U18.8 U$10.1 X29.1
+3V3_VDD_SW: C43.1 C44.1 C47.1 R15.2 U$8.1 X30.1
+3V3_XO: C159.1 R57.2 U34.1 U34.19 U34.20 X35.1
+3V4: C61.1 C62.1 C65.1 R21.2 U19.8 U$11.1 X23.1
+5V0_0: C28.2 C67.1 C68.1 R23.2 U5.7 U5.8 U$12.1 X22.1
+5V0_1: C48.1 C49.1 C108.2 R17.2 U23.8 U$5.1 X2.1
+5V0_2: C110.1 C111.1 C118.2 R37.2 U25.8 U$9.1 X9.1
+5V0_3: C120.1 C121.1 C128.2 R41.2 U27.7 U27.8 U$18.1 X17.1
+5V0_4: C130.1 C131.1 C138.2 R45.2 U29.7 U29.8 U$19.1 X25.1
+5V0_5: C155.1 C156.1 C163.1 R55.2 U34.14 U34.15 U34.16 U34.17 U$21.1 X28.1
+5V0_ADAR: C72.1 C73.1 R25.2 U20.8 U21.8 U$13.1 X13.1
+5V0_ADTR: C145.1 C146.1 C153.1 R51.2 U32.15 U32.16 U32.17 U$20.1 X26.1
+5V0_LO: C140.2 U30.2 X6.1
+5V0_PA_1: C78.1 C79.1 R27.2 U$14.1 X31.1
+5V0_PA_2: C84.1 C85.1 R29.2 U$15.1 X32.1
+5V0_PA_3: C90.1 C91.1 R31.2 U$16.1 X33.1
+5V5_PA: C82.1 C88.1 R33.2 U22.8 U$17.1 X3.1
-3V3_SW: C97.2 U18.5 X18.1
-3V4: C99.2 U19.5 X24.1
-5V0_ADAR12: C101.2 U20.5 X21.1
-5V0_ADAR34: C103.2 U21.5 X20.1
-5V5_PA: C105.2 U22.5 X19.1
EN_+1V0_FPGA: SV1.1 U1.5
EN_+1V8_CLOCK: SV1.8 U25.7
EN_+1V8_FPGA: SV1.3 U2.5
EN_+3V3_ADAR12: SV1.9 U6.5
EN_+3V3_ADAR34: SV1.11 U7.5
EN_+3V3_ADTR: SV1.13 U32.14
EN_+3V3_CLOCK: SV1.10 U23.7
EN_+3V3_FPGA: SV1.5 U4.5
EN_+3V3_SW: SV1.15 U10.5
EN_+3V3_VDD_SW: SV1.17 U8.5
EN_+5V0_ADAR: SV1.7 U13.5
EN_+5V0_PA1: SV1.19 U14.5
EN_+5V0_PA2: SV1.2 U15.5
EN_+5V0_PA3: SV1.4 U16.5
EN_+5V5_PA: SV1.6 U17.5
GND: C2.2 C3.2 C4.2 C5.2 C7.2 C8.2 C9.2 C10.2 C11.2 C13.2 C14.2 C15.2 C16.2 C17.2 C19.2 C20.2 C21.2 C22.2 C23.2 C24.1 C25.1 C26.1 C27.1 C28.1 C31.2 C32.2 C33.2 C34.2 C35.2 C37.2 C38.2 C39.2 C40.2 C41.2 C43.2 C44.2 C45.2 C46.2 C47.2 C48.2 C49.2 C50.2 C51.2 C52.1 C53.1 C55.2 C56.2 C57.2 C58.2 C59.2 C61.2 C62.2 C63.2 C64.2 C65.2 C67.2 C68.2 C69.2 C70.2 C72.2 C73.2 C74.2 C75.2 C78.2 C79.2 C80.2 C81.2 C82.2 C84.2 C85.2 C86.2 C87.2 C88.2 C90.2 C91.2 C92.2 C93.2 C94.2 C95.2 C97.1 C99.1 C101.1 C103.1 C105.1 C106.1 C107.1 C108.1 C110.2 C111.2 C112.2 C113.2 C114.1 C115.1 C116.1 C117.1 C118.1 C120.2 C121.2 C122.2 C123.2 C124.1 C125.1 C126.1 C127.1 C128.1 C130.2 C131.2 C132.2 C133.2 C134.1 C135.1 C136.1 C137.1 C138.1 C139.1 C140.1 C141.1 C142.1 C143.1 C145.2 C146.2 C147.2 C148.2 C149.2 C151.2 C152.2 C153.2 C155.2 C156.2 C157.2 C158.2 C159.2 C161.2 C162.2 C163.2 R2.1 R4.1 R6.1 R8.1 R10.1 R12.1 R14.1 R16.1 R18.1 R20.1 R22.1 R24.1 R26.1 R28.1 R30.1 R32.1 R34.1 R36.1 R38.1 R40.1 R42.1 R44.1 R46.1 R48.1 R50.1 R52.1 R54.1 R56.1 R58.1 SV1.12 SV1.14 SV1.16 SV1.18 SV1.20 U1.1 U2.1 U3.1 U4.1 U5.4 U5.9 U6.1 U7.1 U8.1 U9.1 U10.1 U11.1 U12.1 U13.1 U14.1 U15.1 U16.1 U17.1 U18.3 U18.6 U19.3 U19.6 U20.3 U20.6 U21.3 U21.6 U22.3 U22.6 U23.4 U23.9 U24.1 U25.4 U25.9 U26.1 U27.4 U27.9 U28.1 U29.4 U29.9 U30.4 U30.9 U31.1 U32.8 U32.18 U32.21 U33.1 U34.8 U34.18 U34.21 X1.2 X2.2 X3.2 X4.2 X5.2 X6.2 X7.2 X8.2 X9.2 X10.2 X11.2 X12.2 X13.2 X14.2 X15.2 X16.2 X17.2 X18.2 X19.2 X20.2 X21.2 X22.2 X23.2 X24.2 X25.2 X26.2 X27.2 X28.2 X29.2 X30.2 X31.2 X32.2 X33.2 X34.2 X35.2
N$1: C1.2 U1.2 U$1.2
N$2: C1.1 U1.6
N$3: C6.2 U2.2 U$2.2
N$4: R1.1 R2.2 U1.4
N$5: C6.1 U2.6
N$6: R3.1 R4.2 U2.4
N$7: C12.2 U3.2 U$3.2
N$8: C12.1 U3.6
N$9: R5.1 R6.2 U3.4
N$10: C18.2 U4.2 U$4.2
N$11: C18.1 U4.6
N$12: R7.1 R8.2 U4.4
N$13: C24.2 U5.1
N$14: C139.2 U30.1
N$15: C26.2 U5.3
N$16: C30.2 U6.2 U$6.2
N$17: C30.1 U6.6
N$18: R11.1 R12.2 U6.4
N$19: C36.2 U7.2 U$7.2
N$20: C36.1 U7.6
N$21: R13.1 R14.2 U7.4
N$22: C42.2 U8.2 U$8.2
N$23: C42.1 U8.6
N$24: R15.1 R16.2 U8.4
N$25: R9.1 R10.2 U5.5
N$26: C29.2 U9.2 U$5.2
N$27: C27.2 R9.2 U5.6
N$28: C54.2 U10.2 U$10.2
N$29: C54.1 U10.6
N$30: R19.1 R20.2 U10.4
N$31: C60.2 U11.2 U$11.2
N$32: C60.1 U11.6
N$33: R21.1 R22.2 U11.4
N$34: C66.2 U12.2 U$12.2
N$35: C66.1 U12.6
N$36: R23.1 R24.2 U12.4
N$37: C71.2 U13.2 U$13.2
N$38: C71.1 U13.6
N$39: R25.1 R26.2 U13.4
N$40: C77.2 U14.2 U$14.2
N$41: C77.1 U14.6
N$42: R27.1 R28.2 U14.4
N$43: C83.2 U15.2 U$15.2
N$44: C83.1 U15.6
N$45: R29.1 R30.2 U15.4
N$46: C89.2 U16.2 U$16.2
N$47: C89.1 U16.6
N$48: R31.1 R32.2 U16.4
N$49: C76.2 U17.2 U$17.2
N$50: C76.1 U17.6
N$51: R33.1 R34.2 U17.4
N$52: C98.1 U19.2
N$53: C98.2 U19.4
N$54: C96.1 U18.2
N$55: C96.2 U18.4
N$56: C100.1 U20.2
N$57: C100.2 U20.4
N$58: C102.1 U21.2
N$59: C102.2 U21.4
N$60: C104.1 U22.2
N$61: C104.2 U22.4
N$62: C141.2 U30.3
N$63: R49.1 R50.2 U30.5
N$64: C29.1 U9.6
N$65: R17.1 R18.2 U9.4
N$66: C52.2 U23.1
N$67: C142.2 R49.2 U30.6
N$68: C106.2 U23.3
N$69: R35.1 R36.2 U23.5
N$70: C107.2 R35.2 U23.6
N$71: C144.2 U31.2 U$20.2
N$72: C144.1 U31.6
N$73: C109.2 U24.2 U$9.2
N$74: C109.1 U24.6
N$75: R37.1 R38.2 U24.4
N$76: C114.2 U25.1
N$77: R51.1 R52.2 U31.4
N$78: C116.2 U25.3
N$79: R39.1 R40.2 U25.5
N$80: C117.2 R39.2 U25.6
N$81: C154.2 U33.2 U$21.2
N$82: C150.1 U32.2
N$83: C119.2 U26.2 U$18.2
N$84: C119.1 U26.6
N$85: R41.1 R42.2 U26.4
N$86: C124.2 U27.1
N$87: C154.1 U33.6
N$88: C126.2 U27.3
N$89: R43.1 R44.2 U27.5
N$90: C127.2 R43.2 U27.6
N$91: C150.2 R53.1 R54.2 U32.3
N$92: C151.1 U32.12
N$93: C129.2 U28.2 U$19.2
N$94: C129.1 U28.6
N$95: R45.1 R46.2 U28.4
N$96: C134.2 U29.1
N$97: R55.1 R56.2 U33.4
N$98: C136.2 U29.3
N$99: R47.1 R48.2 U29.5
N$100: C137.2 R47.2 U29.6
N$101: C152.1 U32.13
N$102: C160.1 U34.2
N$103: C160.2 R57.1 R58.2 U34.3
N$104: C161.1 U34.12
N$105: C162.1 U34.13
VIN: C4.1 C5.1 C9.1 C10.1 C15.1 C16.1 C21.1 C22.1 C33.1 C34.1 C39.1 C40.1 C45.1 C46.1 C50.1 C51.1 C57.1 C58.1 C63.1 C64.1 C69.1 C70.1 C74.1 C75.1 C80.1 C81.1 C86.1 C87.1 C92.1 C93.1 C94.1 C95.1 C112.1 C113.1 C122.1 C123.1 C132.1 C133.1 C143.2 C147.1 C148.1 C157.1 C158.1 U1.3 U2.3 U3.3 U3.5 U4.3 U6.3 U7.3 U8.3 U9.3 U9.5 U10.3 U11.3 U11.5 U12.3 U12.5 U13.3 U14.3 U15.3 U16.3 U17.3 U24.3 U24.5 U26.3 U26.5 U28.3 U28.5 U30.7 U30.8 U31.3 U31.5 U33.3 U33.5 X1.1

## Tracks (layer width: path | path; a pad name or v marks a point on that pad's centre or on a via)
+1V0_FPGA
  Top 0.3: R1.2 119.83,44.22 113.55,50.5 98.15,50.5 93.65,46 93.65,45.7 94.65,44.7
  Top 2: X4.1 89.5,53.37 89.5,47
  pour Top (no thermals): 97.1,35.8 86.65,35.8 86.65,48 97.1,48
+1V8_CLOCK  (2 unrouted)
  pour Top (no thermals): 143.15,228.95 131.95,228.95 131.95,241 143.15,241
+1V8_FPGA
  Top 0.2: R3.2 159.18,42.52 152.5,49.2 133.8,49.2 133.8,47.91 C11.1
  Top 2: U$2.1 129.63,52.68 131.75,54.8 X5.1
  pour Top (no thermals): 135.75,35.75 124.55,35.75 124.55,47.8 135.75,47.8
+3V3
  Top 0.5: R5.2 81.23,46.12 76.8,50.55 61.4,50.55
  Top 2: X16.1 62.65,51.8 61.4,50.55 57.6,46.75
  pour Top (no thermals): 63.65,35.95 52.45,35.95 52.45,48 63.65,48
+3V3_ADAR_12  (1 unrouted)
  Top 0.15: R11.2 196.28,121.87 192,126.15 178.05,126.15 176.3,124.4 176.3,122.65
  pour Top (no thermals): 178.15,112.15 166.95,112.15 166.95,124.2 178.15,124.2
+3V3_ADAR_34  (1 unrouted)
  Top 0.15: R13.2 234.53,116.92 225.35,126.1 214.95,126.1 212.35,123.5
  pour Top (no thermals): 214.6,112.3 203.4,112.3 203.4,124.35 214.6,124.35
+3V3_ADTR  (5 unrouted)
  pour Top (no thermals): 176.7,145.45 165.5,145.45 165.5,157.5 176.7,157.5
+3V3_AN
  pour Top: 222.35,64.25 228.8,64.25 231.1,66.55 236.7,66.55 238,65.25 238,59.85 236.8,58.65 233.55,58.65 229.8,62.4 222.35,62.4
+3V3_CLOCK  (2 unrouted)
  pour Top (no thermals): 184.25,228.75 173.05,228.75 173.05,240.8 184.25,240.8
+3V3_FPGA
  Top 0.152: R7.2 195.18,42.37 185.65,51.9 178.95,51.9 176.65,49.6 176.65,49.11 C19.1
  Top 2: X27.1 163.08,50.97 168.7,45.35
  pour Top (no thermals): 178.35,36.85 167.15,36.85 167.15,48.9 178.35,48.9
+3V3_LO
  pour Top (no thermals): 62.6,114.2 51.4,114.2 51.4,126.25 62.6,126.25
+3V3_LO_1  (2 unrouted)
+3V3_LO_2  (2 unrouted)
+3V3_SW  (2 unrouted)
  Top 0.15: 209.85,157.05 209.95,156.95
  Top 0.152: R19.2 231.73,149.08 235.75,153.1 235.75,159.7 231.05,164.4 223.5,164.4 218.45,159.35 210.45,159.35 209.85,158.75 209.85,157.05
  Top 0.6: U18.8 217,175.66 210.06,168.71
  pour Top (no thermals): 212.55,145.65 201.35,145.65 201.35,157.7 212.55,157.7
+3V3_VDD_SW  (1 unrouted)
  Top 0.15: R15.2 81.53,191.37 74.65,198.25 62.5,198.25 60.05,195.8
  pour Top (no thermals): 62.75,184.1 51.55,184.1 51.55,196.15 62.75,196.15
+3V3_XO  (5 unrouted)
+3V4
  Top 0.15: R21.2 116.08,120.97 109.75,127.3 98.85,127.3 96.5,124.95
  Top 0.6: X23.1 94.97,132.68 91.91,135.75 U19.8
  Top 2: X23.1 97.57,131.02 94.05,127.5 94.05,124.3 94.15,124.2
  pour Top (no thermals): 98.95,113.7 87.75,113.7 87.75,125.75 98.95,125.75
+5V0_0
  Top 0.15: R23.2 234.03,45.62 229.3,50.35 217.2,50.35 214.95,48.1 214.5,48.1
  Top 0.2: U5.7 U5.8
  Top 2: 210.6,47.95 215.01,52.36 X22.1 215.01,61.1 215.15,61.1
  pour Top: 220.35,63.7 220.35,62.5 217.85,62.5 217.85,59.95 214.05,59.95 214.05,63.7
  pour Top (no thermals): 216.9,36.75 205.7,36.75 205.7,48.8 216.9,48.8
+5V0_1  (6 unrouted)
+5V0_2  (6 unrouted)
+5V0_3  (7 unrouted)
+5V0_4  (7 unrouted)
+5V0_5  (9 unrouted)
+5V0_ADAR  (2 unrouted)
  Top 0.15: R25.2 154.63,120.52 148.65,126.5 133.45,126.5 133.25,126.3 133.25,124.55 133.35,124.45
  Top 0.6: 133.07,134.57 U20.8 129.94,139.19 132.05,141.3 132.05,154.2 125.3,160.95 125.3,163.95 127.15,165.8 131.78,165.8 U21.8
  pour Top (no thermals): 135.75,113.15 124.55,113.15 124.55,125.2 135.75,125.2
+5V0_ADTR  (8 unrouted)
+5V0_LO  (2 unrouted)
+5V0_PA_1  (1 unrouted)
  Top 0.15: R27.2 124.98,189.17 116.3,197.85 105.75,197.85 102.3,194.4
  pour Top (no thermals): 105.15,183.1 93.95,183.1 93.95,195.15 105.15,195.15
+5V0_PA_2  (1 unrouted)
  Top 0.15: R29.2 161.38,191.12 154.8,197.7 141.25,197.7 139.7,196.15 139.7,194.4
  pour Top (no thermals): 141.6,183.25 130.4,183.25 130.4,195.3 141.6,195.3
+5V0_PA_3  (1 unrouted)
  Top 0.15: R31.2 197.13,191.17 191.1,197.2 178.2,197.2 176.35,195.35 176.35,194.3 176.55,194.1
  pour Top (no thermals): 178.25,182.65 167.05,182.65 167.05,194.7 178.25,194.7
+5V5_PA  (1 unrouted)
  Top 0.15: R33.2 124.98,232.72 115.25,242.45 104.6,242.45 102.4,240.25 102.4,239.75 102.45,239.7
  Top 0.6: U22.8 73.05,247.3 93.65,247.3 96.75,244.2 96.75,238.45
  pour Top (no thermals): 104.7,228.45 93.5,228.45 93.5,240.5 104.7,240.5
-3V3_SW
  Top 0.6: X18.1 209.96,185.09 C97.2 210.07,179.23 U18.5
-3V4
  Top 0.6: U19.5 83.35,138.51 C99.2 75.75,138.44 X24.1
-5V0_ADAR12
  Top 0.6: C101.2 119.95,139.19 | 119.95,139.19 U20.5 | X21.1 112.07,139.19 119.95,139.19
-5V0_ADAR34
  Top 0.3: X20.1 145.16,165.28 C103.2 136.11,165.28 U21.5
-5V5_PA
  Top 0.6: X19.1 76.3,239.87 C105.2 75.83,239.81 U22.5
EN_+1V0_FPGA  (1 unrouted)
EN_+1V8_CLOCK  (1 unrouted)
EN_+1V8_FPGA  (1 unrouted)
EN_+3V3_ADAR12  (1 unrouted)
EN_+3V3_ADAR34  (1 unrouted)
EN_+3V3_ADTR  (1 unrouted)
EN_+3V3_CLOCK  (1 unrouted)
EN_+3V3_FPGA  (1 unrouted)
EN_+3V3_SW  (1 unrouted)
EN_+3V3_VDD_SW  (1 unrouted)
EN_+5V0_ADAR  (1 unrouted)
EN_+5V0_PA1  (1 unrouted)
EN_+5V0_PA2  (1 unrouted)
EN_+5V0_PA3  (1 unrouted)
EN_+5V5_PA  (1 unrouted)
GND  (via drill 0.35, 0.6)  (116 unrouted)
  Top 0.15: R24.1 231.02,41.83 227.65,45.2 | R14.1 230.67,116.78 227.45,120 | R12.1 193.02,116.63 190.65,119 | R26.1 150.57,115.98 147.65,118.9 | R22.1 112.97,118.48 109.85,121.6 | R20.1 228.02,149.28 225.55,151.75 | R32.1 193.97,185.18 189.35,189.8 | R30.1 157.27,186.48 154.5,189.25 | R28.1 121.12,187.53 118.45,190.2 | R16.1 78.27,187.53 74.45,191.35 | R34.1 121.62,231.88 116.35,237.15
  Top 0.152: R8.1 192.62,41.43 190.55,43.5 187,43.5
  Top 0.2: R4.1 155.37,39.38 152.25,42.5 140.4,42.5 139.48,41.58 C10.2
  Top 0.3: R2.1 116.02,40.23 113.15,43.1 v100.15,43.1 | C103.1 142.86,160.77 X20.2 | U21.3 134.38,158.68 v134.35,158.65 | U21.6 134.38,167.57 v134.25,167.7
  Top 0.5: R6.1 78.47,42.28 75.05,45.7 v71.05,45.7 | v67.55,35.3 67.73,35.12 C16.2 | v65.45,35.4 65.45,33.32 C15.2
  Top 0.6: U20.3 125.92,145.84 v125.9,145.85 | U20.6 126,139.1 v126,137.2 | C101.1 119.58,129.77 | 119.58,129.77 v119.7,129.65 | X21.2 117.07,129.77 119.58,129.77 | v89.35,145.5 89.36,145.49 U19.3 | U19.6 89.36,136.26 v89.35,136.25 | X24.2 77.81,132.2 C99.1 83.3,132.18 v83.3,128.9 | v214.55,186.25 214.55,184.24 U18.3 | X18.2 204.39,184.79 v203.6,184 203.6,179.46 C97.1 203.72,174.72 v203.7,174.7 | U18.6 214.47,177.26 v214.45,177.25 | v76.15,229.9 76.03,230.02 C105.1 83.71,233.36 X19.2 | v71.7,241.25 71.53,241.07 U22.6 | v62.25,241.1 64.41,241.1 U22.3
  other vias: 100.15,45.5 102.65,45.5 102.65,43.1 99.05,35.7 101.15,35.8 67.25,46.5 67.25,44.3 67.15,41.8 139.25,45.85 141.7,45.7 139.05,44 141.35,41.45 137.4,35.7 140.6,35.65 182.6,47.9 182.65,45.85 182.75,43.5 182.1,37 180.3,36.9 185,36.05 222.45,36.8 220.8,36.75 218.8,36.9 220.8,47.45 221,44.95 217.95,122.85 217.75,120.35 217.6,118.05 218.6,111.55 216.25,111.5 222.05,111.3 181.85,123 181.9,120.45 181.75,117.6 179.9,111.8 182.25,111.8 185.65,111.05 137.6,112.35 139.8,112.5 143.45,111.7 138.8,123.55 138.75,121 102.8,124.45 102.7,122 102.8,119.6 101,113.3 103.3,113.4 106.7,112.45 66,125.2 65.95,123.2 65.9,120.8 64.45,113.85 66.7,113.75 70.3,112.75 180.15,156.05 180.25,153.7 180.15,151.05 180.4,145.2 178.25,145.15 184.4,144.2 214.1,145.4 216.15,145.4 220.1,144.5 215.5,157.05 215.55,154.95 215.5,152.55 182.25,182 179.85,182.1 185.85,181.3 181.3,194 181.3,191.4 144.8,194.7 144.65,192.05 143.35,182.65 145.65,182.7 149.35,181.9 112.9,181.85 109.2,182.25 106.8,182.35 108.2,194.1 108.2,191.75 65.75,195.05 65.75,192.85 65.75,190.2 64.5,183.6 66.55,183.65 70.45,182.75 108,239.7 108,237.1 112.5,227.1 108.65,227.85 106.4,227.85 146.1,239.9 146.15,237.65 146.05,235.3 144.95,227.85 147.1,227.75 150.75,227.15 186.95,240.1 187.05,237.9 186.95,235.6 185.95,227.25 188.15,227.2 191.8,226.8 189.3,171.2 199.8,143.45 190.1,149.35 138.6,51.8 110.6,41.5 268.8,94.25 265.5,98.4 262.1,101.3 259.35,102.6 264.85,103.85 266.85,102.05 269,102.25 275.25,105.4 273.6,110.45 223.6,213.5 234.5,222.75 117.95,232.35 153.95,238.35 16.95,198.9 16.65,196.6 22.2,194.95 27.15,199.25 34.4,194.65 24.85,201.75 42.35,200.3 145.55,187.2 149.7,188.3 148.45,191.2 58.8,259.05 75.4,260.65 81.6,271.05 111.35,260.65 121.55,269.85 98.8,262.25 85.2,253.05 42.95,214.8 24.6,231.8 24.6,210 42.15,230 46.2,244.45 66.8,253.25 85.5,227.4 79.95,224.85 66.1,226.95 65.3,231 60.2,226.7 49.6,230.9 108,232.3 110.7,232.7 110.7,235.6 149.1,237.95 151.75,235.7 149.8,232.45 145.95,232.05 143.8,254.85 154.65,251.35 155.3,257 148,252.65 144.65,258.5 168.15,245.85 181.6,253.35 192.45,248.35 189.7,239.25 193.45,237 193,233.95 189.8,231.95 186.8,232.2 67.25,187.1 69.65,189 68.65,190.2 67.55,193.6 75.9,205 73.2,201.85 86.2,194.15 89.35,201.5 88.05,183.15 89.05,187.85 111.4,191.2 108.1,188.15 111.65,188.95 109.4,185.85 118.5,203.85 116.55,201.35 125.3,196.5 130.4,200.8 156.25,203.4 159.95,199.4 162.6,203.7 166.35,201.2 190.65,202.6 196.6,199.1 195.35,204.65 193.3,200.2 187.85,191.05 183.55,187.6 181.6,184.15 180.8,187.75 187.6,188.3 185.8,191.9 201.2,194.8 203.4,193.4 200.2,192.05 213.15,175.2 210.3,173.7 206.65,172.9 220.35,166.05 217.85,154.65 219.7,151.25 217.3,149.2 215.2,147.8 215.55,150.15 217.95,162.1 219.95,157.55 221.05,156.6 222.55,155.1 217.15,156.3 219.8,153.45 221.2,152.3 185.85,166.4 185.65,163.7 188,166 188.6,162.85 193,161.7 190.95,165.35 183,157.8 184.75,155.6 187.55,153.25 186.6,158.4 189.85,155.2 191.9,153.25 192.95,151.05 188.25,151.2 182.65,154.4 182.65,151.4 185.2,152 180.1,148.25 182.9,149.05 146.2,155.15 149.9,155.3 146.85,149.65 150.05,150.3 145.65,144.75 150.2,144.75 139.15,140.5 146.1,138.6 147.3,133.3 150.2,139 125.5,134.95 127.55,132.25 125.95,129.9 127.15,136 122.85,128.2 88.3,133.95 90.15,133.55 88.2,130.25 91.2,130.65 89.25,128.3 101.9,150.15 112.7,148.95 110.55,156.65 99.05,162.85 90.15,161.65 75.25,158.3 70.2,150.4 76.2,144.9 61.8,145.6 60.15,157.35 66.4,156.15 68.3,162.65 55.8,148 221.8,63.45 220.9,65.05 221.8,65.05 220.9,64.25 221.8,64.2 220.9,63.45
  pour Top (no thermals): 105.55,33.6 102.65,33.6 102.65,32.6 97.85,32.6 97.85,47.9 105.55,47.9
  pour Top (no thermals): 143.95,33.55 141.05,33.55 141.05,32.45 136.25,32.45 136.25,47.75 143.95,47.75
  pour Top (no thermals): 225.4,34.1 222.5,34.1 222.5,33.45 217.5,33.45 217.5,48.75 225.4,48.75
  pour Top (no thermals): 72.15,33.6 68.7,33.6 68.7,32.65 64.45,32.65 64.45,47.95 72.15,47.95
  pour Top (no thermals): 186.85,34.2 183.95,34.2 183.95,33.55 178.95,33.55 178.95,48.85 186.85,48.85
  pour Top (no thermals): 71.1,111.45 68.2,111.45 68.2,110.9 63.2,110.9 63.2,126.2 71.1,126.2
  pour Top (no thermals): 107.45,111.05 104.55,111.05 104.55,110.4 99.55,110.4 99.55,125.7 107.45,125.7
  pour Top (no thermals): 144.25,110.5 141.35,110.5 141.35,109.85 136.4,109.85 136.4,125.15 144.25,125.15
  pour Top (no thermals): 186.65,109.5 183.75,109.5 183.75,108.85 178.75,108.85 178.75,124.15 186.65,124.15
  pour Top (no thermals): 223.1,109.7 220.2,109.7 220.2,109 215.2,109 215.2,124.3 223.1,124.3
  pour Top (no thermals): 185.2,142.85 182.3,142.85 182.3,142.15 177.35,142.15 177.35,157.45 185.2,157.45
  pour Top (no thermals): 221.05,142.95 218.15,142.95 218.15,142.35 213.2,142.35 213.2,157.65 221.05,157.65
  pour Top (no thermals): 71.25,181.4 68.35,181.4 68.35,180.8 63.35,180.8 63.35,196.1 71.25,196.1
  pour Top (no thermals): 113.65,180.45 110.75,180.45 110.75,179.8 105.8,179.8 105.8,195.1 113.65,195.1
  pour Top (no thermals): 150.1,180.55 147.2,180.55 147.2,179.95 142.2,179.95 142.2,195.25 150.1,195.25
  pour Top (no thermals): 186.75,180 183.85,180 183.85,179.35 178.9,179.35 178.9,194.65 186.75,194.65
  pour Top (no thermals): 113.2,225.8 110.3,225.8 110.3,225.15 105.35,225.15 105.35,240.45 113.2,240.45
  pour Bottom (isolate 0.406): 0,300 0,0 279.75,0 279.75,300
  pour Top (no thermals): 151.8,225.8 147.85,225.8 147.85,225.15 143.8,225.15 143.8,241.05 151.8,241.05
  pour Top (no thermals): 192.95,225.35 189,225.35 189,224.65 184.95,224.65 184.95,240.85 192.95,240.85
  pour Top (isolate 1.016, rank 2): 0,300 280,300 280,0 0,0
N$1  (via drill 0.6)
  Top 0.3: 107.59,36.54 v107.55,36.5
  Top 0.508: C1.2 107.59,36.54
  Top 1: U$1.2 v96.85,32.9
  Bottom 0.3: 103.65,33 v103.75,32.9
  Bottom 0.508: v107.55,36.5 105.95,36.5 103.65,34.2 103.65,33
  Bottom 1: v96.85,32.9 v103.75,32.9
  pour Top (no thermals): 105.55,33.3 103.05,33.3 103.05,32.5 105.55,32.5
  pour Top (no thermals): 104.45,33.3 104.85,33.3 104.85,32.5 104.45,32.5
N$2
  Top 0.508: U1.6 109.59,33.85 C1.1
N$3  (via drill 0.3, 0.6)
  Top 0.2: 145.35,36.75 v145.15,36.55
  Top 0.508: C6.2 149.25,36.75 145.35,36.75
  Top 0.8: v134.95,32.85 U$2.2 | U2.2 v141.95,32.85
  Bottom 0.508: v145.15,36.55 143.75,36.55 141.95,34.75 v141.95,32.85
  Bottom 0.8: v141.95,32.85 v134.95,32.85
N$4
  Top 0.3: U1.4 116.02,31.95 R2.2 119.35,31.93 119.35,31.8 119.83,31.8 R1.1
N$5
  Top 0.2: 149.02,34.32 C6.1
  Top 0.508: U2.6 148.5,33.8 149.02,34.32
N$6
  Top 0.2: U2.4 155.31,31.9 R4.2 R3.1
N$7  (via drill 0.6)
  Top 0.508: C12.2 73.85,37.85 v73.3,37.85
  Top 1: v62.55,32.8 56.98,32.8 U$3.2 | U3.2 v69.45,32.85
  Bottom 0.5: 69.3,33 v69.45,32.85
  Bottom 0.508: v73.3,37.85 72.1,37.85 69.3,35.05 69.3,33
  Bottom 1: v69.45,32.85 62.5,32.85 62.5,32.8 v62.55,32.8
N$8
  Top 0.5: 75.06,33.8 C12.1
  Top 0.508: U3.6 75.06,33.8
N$9
  Top 0.5: U3.4 R6.2 81.2,31.89 R5.1
N$10  (via drill 0.3, 0.6)
  Top 0.508: C18.2 188.2,41.05 v187.65,41.05
  Top 1: U4.2 v185.05,33.5 | v177.25,33.5 172.27,33.5 U$4.2
  Bottom 0.508: v187.65,41.05 185.15,38.55 184.8,38.55 184,37.75 184,33.5
  Bottom 1: v185.05,33.5 184,33.5 v177.25,33.5
N$11
  Top 0.508: U4.6 189.88,35.42 C18.1
N$12
  Top 0.152: U4.4 190.65,32.55 191.15,33.05 192.59,33.05 R8.2 195.13,33.02 R7.1
N$13  (1 unrouted)
N$14  (1 unrouted)
N$15
  Top 0.2: U5.3 224.85,64.5 226.65,66.3 C26.2
N$16  (via drill 0.35, 0.6)
  Top 0.6: C30.2 187.78,114.52 187.75,114.55 v187.7,114.55
  Top 0.8: v176.45,108.85 172.7,108.85 172.25,108.4 171.88,108.4 U$6.2 | U6.2 v184.8,108.85
  Bottom 0.6: v187.7,114.55 185.3,114.55 184.3,113.55 184.3,108.85
  Bottom 0.8: v184.8,108.85 184.3,108.85 176.55,108.85 176.5,108.8 v176.45,108.85
N$17
  Top 0.6: U6.6 189.88,110.94 C30.1
N$18
  Top 0.15: U6.4 193,107.9 R12.2 196.23,107.92 R11.1
N$19  (via drill 0.3, 0.6)
  Top 0.508: C36.2 226.35,115.35 224.7,115.35 v224.7,115.4
  Top 0.8: U7.2 222.41,109 v221.4,109 | v213,109 207.93,109 U$7.2
  Bottom 0.6: v224.7,115.4 223.6,115.4 220.2,112 220.2,109
  Bottom 0.8: v221.4,109 220.2,109 v213,109
N$20
  Top 0.508: U7.6 226.6,110 227.4,110.8 227.4,112.4 C36.1
N$21
  Top 0.15: U7.4 R14.2 | R14.2 | R14.2 234.5,108.1 R13.1
N$22  (via drill 0.35, 0.6)
  Top 0.6: C42.2 72.73,186.17 v72.7,186.2
  Top 0.8: U8.2 69.35,180.75 69.3,180.8 v69.25,180.8 | v61.35,180.8 56.13,180.8 U$8.2
  Bottom 0.6: v72.7,186.2 70.75,186.2 68.6,184.05 68.6,180.8
  Bottom 0.8: v69.25,180.8 68.6,180.8 v61.35,180.8
N$23
  Top 0.6: U8.6 74.95,181.7 75.45,182.2 75.45,184.25 C42.1
N$24
  Top 0.15: U8.4 77.79,179.8 R16.2 81.47,180.28 R15.1
N$25  (via drill 0.35)
  Top 0.2: R10.2 R9.1 217.9,70.05 v217.55,69.7 | U5.5 218.3,65 v217.95,65.35
  Bottom 0.2: v217.95,65.35 216.75,66.55 216.75,68.95 217.5,69.7 v217.55,69.7
N$26  (2 unrouted)
N$27
  Top 0.2: U5.6 216.8,64.5 215.75,65.55 215.75,66.65 216.85,67.75 C27.2 218.5,69.05 219.8,70.35 R9.2
N$28  (via drill 0.35, 0.6)
  Top 0.6: C54.2 222.57,147.77 222.55,147.75 v222.5,147.75
  Top 0.8: U10.2 v219.35,142.35
  Top 1.016: v210.8,142.35 205.93,142.35 U$10.2
  Bottom 0.6: v222.5,147.75 220.2,147.75 217.9,145.45 217.9,142.5 218.05,142.35
  Bottom 0.8: v219.35,142.35 218.05,142.35 v210.8,142.35
N$29
  Top 0.6: U10.6 224.25,143.3 225,144.05 225,145.85 C54.1
N$30
  Top 0.15: U10.4 226.98,141.4 R20.2 230.94,142.44 231.05,142.55 231.62,142.55 R19.1
N$31  (via drill 0.35, 0.6)
  Top 0.6: C60.2 108.57,116.37 108.25,116.05 v108.2,116.05
  Top 0.8: U11.2 105.55,110.45 105.5,110.4 v105.47,110.42 | v97.55,110.45 92.29,110.45 U$11.2
  Bottom 0.6: v108.2,116.05 105.8,113.65 105.7,113.65 104.75,112.7 104.75,110.42
  Bottom 0.8: v105.47,110.42 104.75,110.42 97.58,110.42 v97.55,110.45
N$32
  Top 0.6: U11.6 110.68,112.52 C60.1
N$33
  Top 0.15: U11.4 112.95,109.5 R22.2 116.05,109.52 R21.1
N$34  (via drill 0.3, 0.6)
  Top 0.508: C66.2 226.77,39.27 226.75,39.25 v226.7,39.25
  Top 1: U12.2 v223.5,33.4 | v215.6,33.4 210.39,33.4 U$12.2
  Bottom 0.508: v226.7,39.25 224.4,36.95 224.4,36.42 223.5,35.51 v223.5,33.4
  Bottom 1: v223.5,33.4 v215.6,33.4
N$35
  Top 0.508: U12.6 228.88,35.74 C66.1
N$36
  Top 0.15: U12.4 R24.2 | R24.2 | R24.2 233.97,32.45 R23.1
N$37  (via drill 0.35, 0.6)
  Top 0.6: C71.2 145.42,115.37 145.4,115.35 v145.38,115.38
  Top 0.8: U13.2 142.55,109.8 142.5,109.85 v142.45,109.85 | v134.35,109.9 128.99,109.9 U$13.2
  Bottom 0.6: v145.38,115.38 143.97,115.38 141.55,112.95 141.55,109.85
  Bottom 0.8: v142.45,109.85 141.55,109.85 134.35,109.85 v134.35,109.9
N$38
  Top 0.6: U13.6 147.33,111.67 C71.1
N$39
  Top 0.15: U13.4 150.54,108.85 R26.2 154.59,108.88 R25.1
N$40  (via drill 0.35, 0.6)
  Top 0.6: C77.2 115.32,185.77 115.3,185.75 v115.25,185.75
  Top 0.8: U14.2 v111.75,179.8 | v103.45,179.8 98.54,179.8 U$14.2
  Bottom 0.6: v115.25,185.75 113.75,185.75 110.8,182.8 110.8,179.8
  Bottom 0.8: v111.75,179.8 110.8,179.8 v103.45,179.8
N$41
  Top 0.6: U14.6 117.35,180.75 118.03,181.43 C77.1
N$42
  Top 0.15: U14.4 120.41,178.85 R28.2 121.19,179.49 R27.1
N$43  (via drill 0.35, 0.6)
  Top 0.6: C83.2 151.63,185.12 v151.6,185.15
  Top 0.8: U15.2 148.25,179.9 v148.2,179.95 | v140.15,179.95 134.84,179.95 U$15.2
  Bottom 0.6: v151.6,185.15 148.9,185.15 147.4,183.65 147.4,180.05 147.5,179.95
  Bottom 0.8: v148.2,179.95 147.5,179.95 v140.15,179.95
N$44
  Top 0.6: U15.6 153.2,180.85 153.8,181.45 153.8,183.2 C83.1
N$45
  Top 0.15: U15.4 157.23,178.95 R30.2 160.59,178.99 160.7,179.1 161.32,179.1 R29.1
N$46  (via drill 0.35, 0.6)
  Top 0.6: C89.2 188.18,184.67 v188.15,184.7
  Top 0.8: U16.2 v184.95,179.35 | v176.55,179.35 171.75,179.35 U$16.2
  Bottom 0.6: v188.15,184.7 185.65,184.7 183.95,183 183.95,179.5 184.1,179.35
  Bottom 0.8: v184.95,179.35 184.1,179.35 v176.55,179.35
N$47
  Top 0.6: U16.6 190.1,180.3 190.73,180.93 C89.1
N$48
  Top 0.15: U16.4 193.75,178.4 R32.2 197.11,178.62 R31.1
N$49  (via drill 0.35, 0.6)
  Top 0.6: C76.2 117.36,230.35 v114.95,230.35
  Top 0.8: U17.2 v111.3,225.15 | v103.35,225.2 98,225.2 U$17.2
  Bottom 0.6: v114.95,230.35 112.6,230.35 110.5,228.25 110.5,225.15
  Bottom 0.8: v111.3,225.15 110.5,225.15 103.4,225.15 v103.35,225.2
N$50
  Top 0.6: U17.6 116.75,226.1 117.45,226.8 117.45,228.5 C76.1
N$51
  Top 0.15: U17.4 121.57,224.2 R34.2 124.89,224.25 R33.1
N$52
  Top 0.6: U19.2 90.64,145.53 92.47,147.37 C98.1
N$53
  Top 0.6: U19.4 86.23,145.3 C98.2
N$54
  Top 0.6: U18.2 215.74,185.49 217.89,187.64 C96.1
N$55
  Top 0.6: U18.4 211.75,185.6 211.75,191.71 C96.2
N$56
  Top 0.6: U20.2 127.19,150.18 C100.1
N$57
  Top 0.6: U20.4 121.75,147.01 121.75,150.28 C100.2
N$58
  Top 0.3: U21.2 133.1,152.4 C102.1
N$59
  Top 0.3: U21.4 135.65,158.96 141.47,153.13 C102.2
N$60
  Top 0.6: C104.1 60.75,243.05 61.45,242.34 U22.2
N$61
  Top 0.6: C104.2 63.01,236.81 64.45,238.25 64.45,239.79 U22.4
N$62  (1 unrouted)
N$63  (2 unrouted)
N$64  (1 unrouted)
N$65  (2 unrouted)
N$66  (1 unrouted)
N$67  (2 unrouted)
N$68  (1 unrouted)
N$69  (2 unrouted)
N$70  (2 unrouted)
N$71  (2 unrouted)
N$72  (1 unrouted)
N$73  (2 unrouted)
N$74  (1 unrouted)
N$75  (2 unrouted)
N$76  (1 unrouted)
N$77  (2 unrouted)
N$78  (1 unrouted)
N$79  (2 unrouted)
N$80  (2 unrouted)
N$81  (2 unrouted)
N$82  (1 unrouted)
N$83  (2 unrouted)
N$84  (1 unrouted)
N$85  (2 unrouted)
N$86  (1 unrouted)
N$87  (1 unrouted)
N$88  (1 unrouted)
N$89  (2 unrouted)
N$90  (2 unrouted)
N$91  (3 unrouted)
N$92  (1 unrouted)
N$93  (2 unrouted)
N$94  (1 unrouted)
N$95  (2 unrouted)
N$96  (1 unrouted)
N$97  (2 unrouted)
N$98  (1 unrouted)
N$99  (2 unrouted)
N$100  (2 unrouted)
N$101  (1 unrouted)
N$102  (1 unrouted)
N$103  (3 unrouted)
N$104  (1 unrouted)
N$105  (1 unrouted)
VIN  (31 unrouted)
  Top 0.1: 49.1,26.75 54.1,26.75 | 47.55,102.1 52.55,102.1 | 47.05,173.1 52.05,173.1 | 158.05,167.1 158.05,172.1
  Top 0.15: U12.5 226.2,33.4 225.7,32.9 225.7,32.45 U12.3 | U12.3 | U11.3 107.65,109.5 108.6,110.45 U11.5
  Top 0.2: U3.5 72.5,32.85 71.8,32.15 71.8,32.05 71.65,31.9 U3.3
  Top 0.6: 44.85,212 48.3,212
  pour Top (no thermals): 105.55,32.2 97.85,32.2 97.85,29 105.55,29
  pour Top (no thermals): 143.95,32.15 136.25,32.15 136.25,28.95 143.95,28.95
  pour Top (no thermals): 225.35,32.7 217.65,32.7 217.65,29.1 225.35,29.1
  pour Top (no thermals): 72.1,32.15 64.4,32.15 64.4,28.8 72.1,28.8
  pour Top (no thermals): 71.05,110.25 63.35,110.25 63.35,105.55 71.05,105.55
  pour Top (no thermals): 107.4,109.75 99.7,109.75 99.7,105.05 107.4,105.05
  pour Top (no thermals): 144.2,109.2 136.5,109.2 136.5,106 144.2,106
  pour Top (no thermals): 186.6,108.2 178.9,108.2 178.9,105 186.6,105
  pour Top (no thermals): 223.05,108.35 215.35,108.35 215.35,105.15 223.05,105.15
  pour Top (no thermals): 185.15,141.5 177.45,141.5 177.45,138.3 185.15,138.3
  pour Top (no thermals): 221,141.7 213.3,141.7 213.3,138.5 221,138.5
  pour Top (no thermals): 71.2,180.15 63.5,180.15 63.5,175.95 71.2,175.95
  pour Top (no thermals): 113.6,179.15 105.9,179.15 105.9,175.95 113.6,175.95
  pour Top (no thermals): 150.05,179.3 142.35,179.3 142.35,176.1 150.05,176.1
  pour Top (no thermals): 186.7,178.7 179,178.7 179,175.5 186.7,175.5
  pour Top (no thermals): 113.15,224.5 105.45,224.5 105.45,221.3 113.15,221.3
  pour Top: 49.1,30.25 268.85,30.25 268.85,22.25 49.1,22.25
  pour Top (no thermals): 186.8,32.8 179.1,32.8 179.1,28.7 186.8,28.7
  pour Top: 48.05,106.6 224.05,106.6 224.05,98.6 48.05,98.6
  pour Top: 22.1,20.25 22.1,188.25 2.6,188.25 2.6,20.25
  pour Top: 45.55,177.1 187.55,177.1 187.55,169.1 45.55,169.1
  pour Top: 223.05,139.6 223.05,135.1 153.55,135.1 153.55,170.6 163.05,170.6 163.05,139.6
  pour Top: 46.05,221.8 215.5,221.8 215.5,208.4 46.05,208.4
  pour Top (no thermals): 151.65,224.5 143.95,224.5 143.95,221.3 151.65,221.3
  pour Top (no thermals): 192.6,224.1 184.9,224.1 184.9,220.9 192.6,220.9

## Text on the board
tDocu: EN | EN | EN | GND | GND | +5V5_PA | -5V5_PA | +1V8_CLOCK | +3V3_CLOCK | GND | EN | EN | EN | EN | GND | GND | GND | GND | +5V0_PA_1 | +3V3_VDD_SW | +5V0_PA_2 | +5V0_PA_3 | -3V3_SW | GND | +3V3_ADTR | EN | EN | +3V3_SW | GND | GND | -5V0_ADAR34 | GND | -3V4 | -5V0_ADAR12 | EN | +3V3_LO | Vin [12-17]V | EN | EN | GND | GND | GND | GND | GND | GND | +3V3_ADAR_12 | GND | +3V4 | +3V3_ADAR_34 | +5V0_ADAR | GND | +3V3_AN | +1V0_FPGA | +1V8_FPGA | GND | +3V3 | GND | GND | GND | GND | GND | +5V0_0 | +3V3_FPGA